# EAGLE board board_matei (EAGLE 9.7.0)
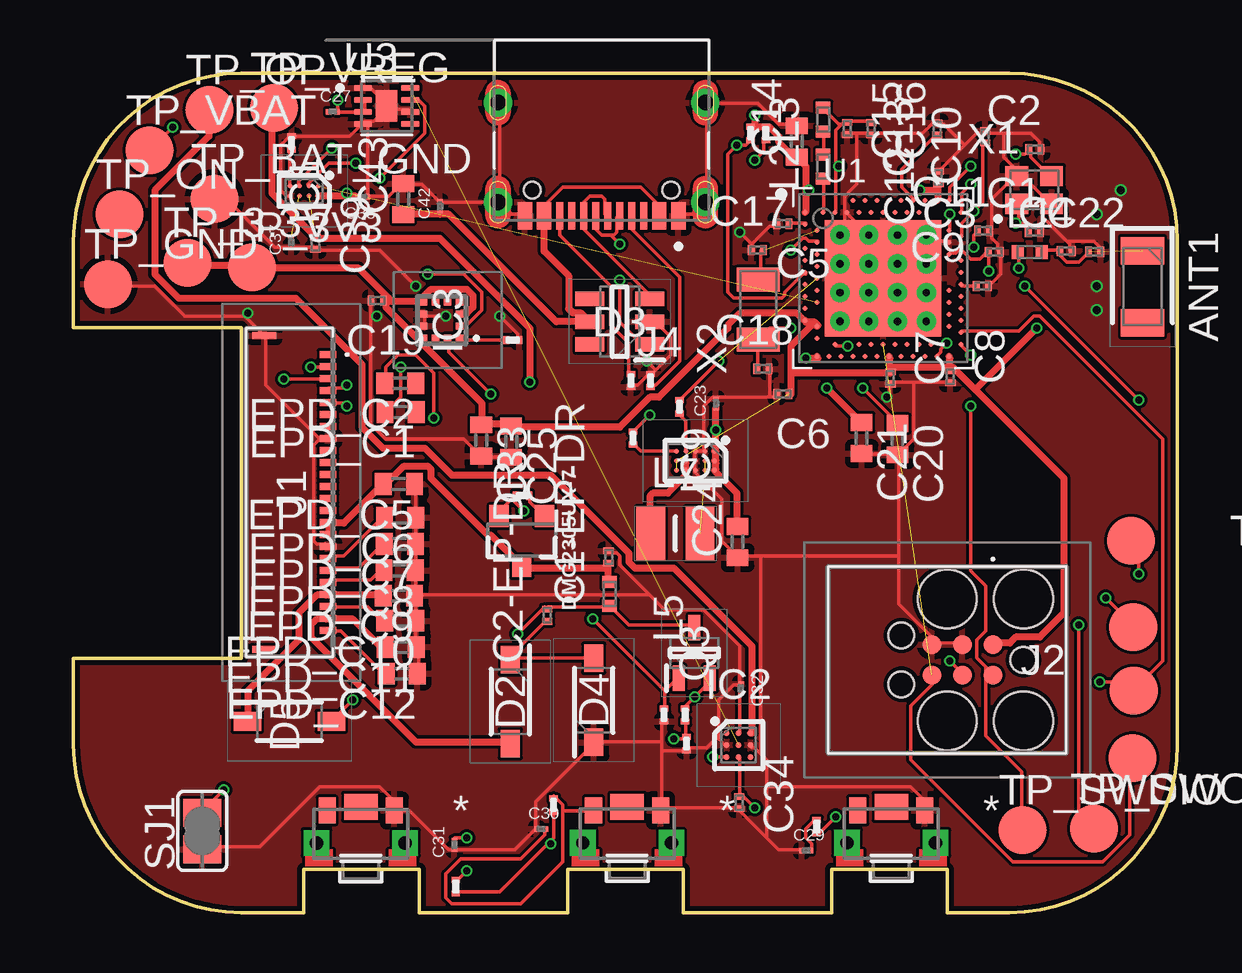
[diagram p0: board, top side]
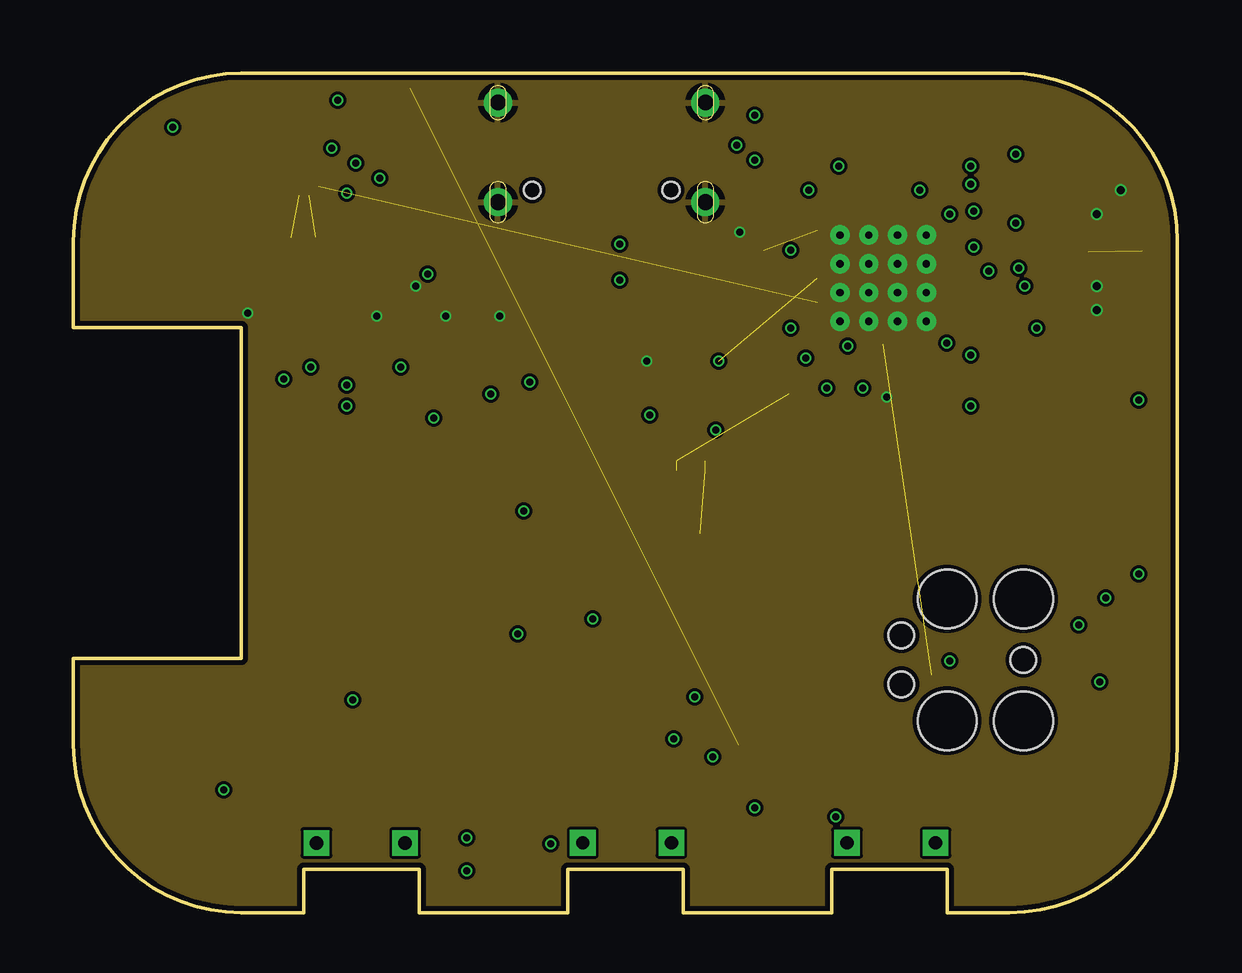
[diagram p1: board, inner layer Route2]
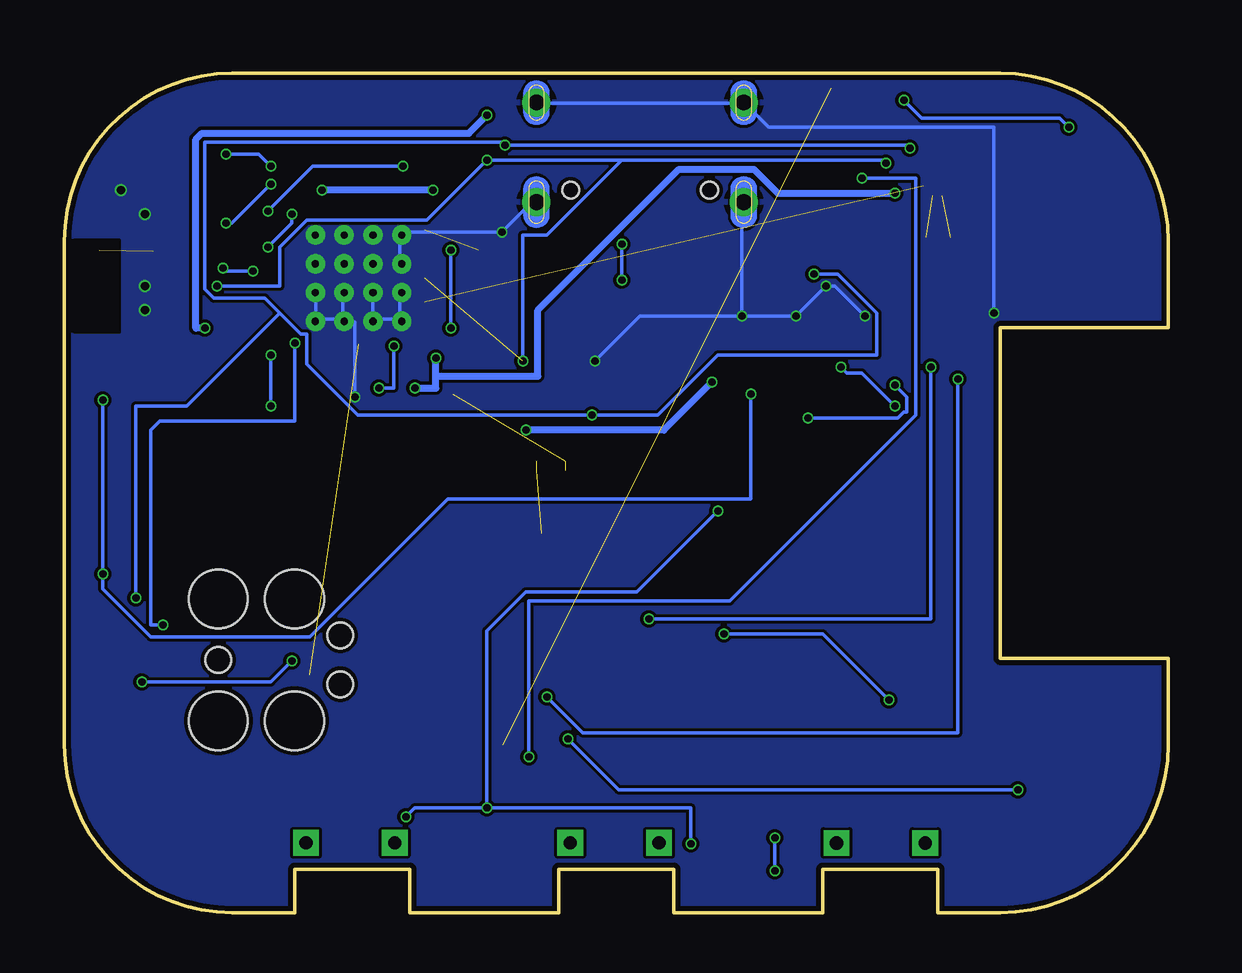
[diagram p2: board, bottom side, seen from below]

Size 46 x 35 mm. Coordinates in mm from the lower left corner, seen from the top.
Outline: 39,0 36.4,0 36.4,1.8 31.6,1.8 31.6,0 25.4,0 25.4,1.8 20.6,1.8 20.6,0 14.4,0 14.4,1.8 9.6,1.8 9.6,0 7,0 arc-90 0,7 0,10.6 7,10.6 7,24.4 0,24.4 0,28 arc-90 7,35 39,35 arc-90 46,28 46,7 arc-90 39,0
Copper layers (1*16): Top 0.035mm / dielectric 1.6mm / Bottom 0.035mm
Design rules "jlcpcb-2layers.dru": minimum track width 5mil, minimum drill 0.3mm, track to track 5mil, track to pad 5mil, pad to pad 5mil, via to via 5mil, smd to smd 5mil, copper to edge 0.2mm, drill to drill 6mil, minimum pad ring 10mil, minimum via ring 3mil, stop-mask expansion 4mil, vias tented up to drill 0mil, thermal gap 10mil
Net classes: 0 default: width 0.15 mm; 1 Power: width 0.3 mm
tRestrict: area 43.7,24.2 to 45.6,28
bRestrict: area 43.7,24.2 to 45.6,28
vRestrict: area 43.7,24.2 to 45.6,28; area 43.7,24.2 to 45.6,28

## Footprints (pad centres in the part's own frame; a part is rotated, then mirrored left to right if it is on the bottom)
2450AT18B100E_ANTC3216X140N = smd 1.15 x 1.8: 1 -1.5,0; 2 1.5,0
NORDIC_NRF_3_RESC0201_L = smd 0.28 x 0.43: 1 -0.255,0; 2 0.255,0
ESP32_C6_LIBRARY_1_ESP32_WROVER_EAGLE-LTSPICE_C0402 = smd 0.7 x 0.9: 1 -0.65,0; 2 0.65,0
GRM011R60J152KE01L_2_CAPC0201X13N = smd 0.22 x 0.23: 1 -0.185,0; 2 0.185,0
ESP32_C6_LIBRARY_5_SOD3716X135N = smd 1.15 x 0.8: 1 -1.75,0; 2 1.75,0
ESP32_C6_LIBRARY_3_SOT95P280X145-6N = smd 1.2 x 0.6: 1 -1.25,0.95; 2 -1.25,0; 3 -1.25,-0.95; 4 1.25,-0.95; 5 1.25,0; 6 1.25,0.95
ESP32_C6_LIBRARY_4_ESP32_C6_LIBRARY_4_ESP32_C6_LIBRARY_4_ESP32_C6_LIBRARY_4_ESP32_WROVER_SPARKFUN-DISCRETESEMI_SOT23-3 = smd 0.8 x 0.9: 1 -0.95,-1; 2 0.95,-1; 3 0,1.1
BQ25180YBGR_BGA8C40P2X4_100X155X50 = smd 0.2 x 0.2: A1 -0.2,0.6; A2 0.2,0.6; B1 -0.2,0.2; B2 0.2,0.2; C1 -0.2,-0.2; C2 0.2,-0.2; D1 -0.2,-0.6; D2 0.2,-0.6
DRV2605YZFR_BGA9C50P3X3_144X144X62 = smd 0.25 x 0.25: A1 -0.5,0.5; A2 0,0.5; A3 0.5,0.5; B1 -0.5,0; B2 0,0; B3 0.5,0; C1 -0.5,-0.5; C2 0,-0.5; C3 0.5,-0.5
BMA423_BMA423 = smd 0.3 x 0.35: 1 -0.75,-0.775; 2 -0.25,-0.775; 3 0.25,-0.775; 4 0.75,-0.775; 7 0.75,0.775; 8 0.25,0.775; 9 -0.25,0.775; 10 -0.75,0.775 | smd 0.35 x 0.3: 5 0.775,-0.25; 6 0.775,0.25; 11 -0.775,0.25; 12 -0.775,-0.25
RT6160AWSC_BGA15C40P3X5_140X230X60 = smd 0.216 x 0.216: A1 -0.4,0.8; A2 0,0.8; A3 0.4,0.8; B1 -0.4,0.4; B2 0,0.4; B3 0.4,0.4; C1 -0.4,0; C2 0,0; C3 0.4,0; D1 -0.4,-0.4; D2 0,-0.4; D3 0.4,-0.4; E1 -0.4,-0.8; E2 0,-0.8; E3 0.4,-0.8
503480-2400_5034802400 = smd 0.3 x 0.7: 1 -5.75,1.525; 2 -5.25,1.525; 3 -4.75,1.525; 4 -4.25,1.525; 5 -3.75,1.525; 6 -3.25,1.525; 7 -2.75,1.525; 8 -2.25,1.525; 9 -1.75,1.525; 10 -1.25,1.525; 11 -0.75,1.525; 12 -0.25,1.525; 13 0.25,1.525; 14 0.75,1.525; 15 1.25,1.525; 16 1.75,1.525; 17 2.25,1.525; 18 2.75,1.525; 19 3.25,1.525; 20 3.75,1.525; 21 4.25,1.525; 22 4.75,1.525; 23 5.25,1.525; 24 5.75,1.525 | smd 0.3 x 1: MP1 -6.54,-1.125; MP2 6.54,-1.125
TC2030-IDC_TC2030IDC = smd 0.783 x 0.783: 1 -0.953,-0.635; 2 -0.953,0.635; 3 0.317,-0.635; 4 0.317,0.635; 5 1.588,-0.635; 6 1.588,0.635 | hole 2.451: -2.223,-2.54; -2.223,2.54; 0.952,-2.54; 0.952,2.54 | hole 1.067: -2.223,0; 2.857,-1.016; 2.857,1.016
KH-TYPE-C-16P_KINGHELM_KH-TYPE-C-16P = smd 0.6 x 1.15: A1_B12 -3.2,4.725; A4_B9 -2.4,4.725; A9_B4 2.4,4.725; A12_B1 3.2,4.725 | smd 0.3 x 1.15: A5 -1.25,4.725; A6 -0.25,4.725; A7 0.25,4.725; A8 1.25,4.725; B5 1.75,4.725; B6 0.75,4.725; B7 -0.75,4.725; B8 -1.75,4.725 | drill 0.65 pad 1.05: SH1 -4.32,0; SH2 4.32,0; SH3 -4.32,4.15; SH4 4.32,4.15 | hole 0.7: -2.89,3.65; 2.89,3.65
NORDIC_NRF_2_RESC0402_L = smd 0.5 x 0.6: 1 -0.5,0; 2 0.5,0
MLP2016SR47MT0S1_INDC2016X100N = smd 1.2 x 2.2: 1 -1.028,0; 2 1.028,0
ESP32_C6_LIBRARY_6_SOT65P210X110-3N = smd 1.05 x 0.5: 1 -1.05,0.65; 2 -1.05,-0.65; 3 1.05,0
ERA-1AEB3401C_0201 = smd 0.35 x 0.25: 1 0,0.275; 2 0,-0.275
CPF0201D7K68C1_0201 = smd 0.35 x 0.25: 1 0,0.275; 2 0,-0.275
ESP32_C6_LIBRARY_7_JUMPER_SJ = smd 1.168 x 1.6: 1 -0.762,0; 2 0.762,0
2025-10-22_07-23-44_LIBRARY_SW_EVP-AKE31A_PAN = smd 0.711 x 1.092: 1 -1.4,-0.972; 2 1.4,-0.972 | drill 0.559 pad 0.914 square: 3 -1.848,0.381; 4 1.848,0.381 | smd 1.397 x 1.092: 5 0,-1.124
HECTOR_WATCH_1_TP20R = smd 2 x 2: TP 0,0
NORDIC_NRF_4_AQFN50P700X700X85_HS-74N = smd 4.85 x 4.85: P$74 0,0 | drill 0.3 pad 0.6: P$75 -1.8,1.8; P$76 -0.6,1.8; P$77 0.6,1.8; P$78 1.8,1.8; P$79 -1.8,0.6; P$80 -0.6,0.6; P$81 0.6,0.6; P$82 1.8,0.6; P$83 -1.8,-0.6; P$84 -0.6,-0.6; P$85 0.6,-0.6; P$86 1.8,-0.6; P$87 -1.8,-1.8; P$88 -0.6,-1.8; P$89 0.6,-1.8; P$90 1.8,-1.8 | smd 0.2 x 0.2: P$A8 -1.25,3.25; P$A10 -0.75,3.25; P$A12 -0.25,3.25; P$A14 0.25,3.25; P$A16 0.75,3.25; P$A18 1.25,3.25; P$A20 1.75,3.25; P$A22 2.25,3.25; P$A23 2.75,3.25; P$AA24 3.25,-2.25; P$AB2 -2.75,-2.5; P$AC5 -2,-2.75; P$AC9 -1,-2.75; P$AC11 -0.5,-2.75; P$AC13 0,-2.75; P$AC15 0.5,-2.75; P$AC17 1,-2.75; P$AC19 1.5,-2.75; P$AC21 2,-2.75; P$AC24 3.25,-2.75; P$AD2 -2.75,-3.25; P$AD4 -2.25,-3.25; P$AD6 -1.75,-3.25; P$AD8 -1.25,-3.25; P$AD10 -0.75,-3.25; P$AD12 -0.25,-3.25; P$AD14 0.25,-3.25; P$AD16 0.75,-3.25; P$AD18 1.25,-3.25; P$AD20 1.75,-3.25; P$AD22 2.25,-3.25; P$AD23 2.75,-3.25; P$B1 -3.25,2.75; P$B3 -2.5,2.75; P$B5 -2,2.75; P$B7 -1.5,2.75; P$B9 -1,2.75; P$B11 -0.5,2.75; P$B13 0,2.75; P$B15 0.5,2.75; P$B17 1,2.75; P$B19 1.5,2.75; P$B24 3.25,2.75; P$C1 -3.25,2.25; P$D2 -2.75,2; P$D23 2.75,2; P$E24 3.25,1.75; P$F2 -2.75,1.5; P$F23 2.75,1.5; P$G1 -3.25,1.25; P$H2 -2.75,1; P$H23 2.75,1; P$J1 -3.25,0.75; P$J24 3.25,0.75; P$K2 -2.75,0.5; P$L1 -3.25,0.25; P$L24 3.25,0.25; P$M2 -2.75,0; P$N1 -3.25,-0.25; P$N24 3.25,-0.25; P$P2 -2.75,-0.5; P$P23 2.75,-0.5; P$R1 -3.25,-0.75; P$R24 3.25,-0.75; P$T2 -2.75,-1; P$T23 2.75,-1; P$U1 -3.25,-1.25; P$U24 3.25,-1.25; P$V23 2.75,-1.5; P$W1 -3.25,-1.75; P$W24 3.25,-1.75; P$Y2 -2.75,-2; P$Y23 2.75,-2
ESP32_C6_LIBRARY_SON50P200X200X80-9N = smd 0.76 x 0.27: 1 -0.985,0.75; 2 -0.985,0.25; 3 -0.985,-0.25; 4 -0.985,-0.75; 5 0.985,-0.75; 6 0.985,-0.25; 7 0.985,0.25; 8 0.985,0.75 | smd 0.9 x 1.3: 9 0,0
NORDIC_NRF_BT-XTAL_2016_N = smd 0.95 x 0.85: 1 -0.725,-0.575; 2 0.725,-0.575; 3 0.725,0.575; 4 -0.725,0.575
NORDIC_NRF_1_XTAL_3215_N = smd 1 x 1.8: 1 -1.25,0; 2 1.25,0

## Placement (x,y rotation side)
ANT1  2450AT18B100E  [2450AT18B100E_ANTC3216X140N]  44.54,26.1 270 top
C1  12pF  [NORDIC_NRF_3_RESC0201_L]  40.04,28.38 0 top
C1-EP-DR  10uF  [NORDIC_NRF_3_RESC0201_L]  22.3,14.83 90 top
C2  12pF  [NORDIC_NRF_3_RESC0201_L]  40.06,31.82 0 top
C2-EP-DR  4.7uF/25V  [NORDIC_NRF_3_RESC0201_L]  19.74,12.4 90 top
C3  1pF  [NORDIC_NRF_3_RESC0201_L]  38.37,27.54 0 top
C4  1pF  [NORDIC_NRF_3_RESC0201_L]  41.36,27.58 0 top
C5  100nF  [NORDIC_NRF_3_RESC0201_L]  29.56,28.72 180 top
C6  4.7µF  [NORDIC_NRF_3_RESC0201_L]  29.56,21.62 180 top
C7  100nF  [NORDIC_NRF_3_RESC0201_L]  34.04,22.29 270 top
C8  100nF  [NORDIC_NRF_3_RESC0201_L]  36.54,22.34 270 top
C9  820pF  [NORDIC_NRF_3_RESC0201_L]  37.87,26.12 0 top
C10  N.C.  [NORDIC_NRF_3_RESC0201_L]  37.99,32.35 90 top
C11  100pF  [NORDIC_NRF_3_RESC0201_L]  37.92,28.42 0 top
C12  100nF  [NORDIC_NRF_3_RESC0201_L]  36.04,30.65 90 top
C13  N.C.  [NORDIC_NRF_3_RESC0201_L]  35.99,32.67 90 top
C14  4.7µF  [ESP32_C6_LIBRARY_1_ESP32_WROVER_EAGLE-LTSPICE_C0402]  30.14,32.15 90 top
C15  1.0µF  [NORDIC_NRF_3_RESC0201_L]  32.24,32.69 270 top
C16  47nF  [NORDIC_NRF_3_RESC0201_L]  33.24,32.68 270 top
C17  12pF  [NORDIC_NRF_3_RESC0201_L]  28.5,27.62 0 top
C18  12pF  [NORDIC_NRF_3_RESC0201_L]  28.73,22.67 0 top
C19  100nF  [NORDIC_NRF_3_RESC0201_L]  12.66,25.52 180 top
C20  4.7µF  [ESP32_C6_LIBRARY_1_ESP32_WROVER_EAGLE-LTSPICE_C0402]  34.34,19.74 270 top
C21  4.7µF  [ESP32_C6_LIBRARY_1_ESP32_WROVER_EAGLE-LTSPICE_C0402]  32.84,19.79 270 top
C22  N.C.  [NORDIC_NRF_3_RESC0201_L]  42.55,27.55 0 top
C23  0.1uF  [GRM011R60J152KE01L_2_CAPC0201X13N]  26.77,21.23 90 top
C24  10uF  [ESP32_C6_LIBRARY_1_ESP32_WROVER_EAGLE-LTSPICE_C0402]  27.67,15.45 90 top
C25  22uF  [ESP32_C6_LIBRARY_1_ESP32_WROVER_EAGLE-LTSPICE_C0402]  18.24,19.64 270 top
C27  0.1uF  [GRM011R60J152KE01L_2_CAPC0201X13N]  10.81,33.39 0 top
C29  1uF  [GRM011R60J152KE01L_2_CAPC0201X13N]  30.53,2.59 0 top
C30  1uF  [GRM011R60J152KE01L_2_CAPC0201X13N]  19.49,3.49 0 top
C31  1uF  [GRM011R60J152KE01L_2_CAPC0201X13N]  15.87,2.83 90 top
C32  1uF  [GRM011R60J152KE01L_2_CAPC0201X13N]  27.81,9.35 270 top
C33  22uF  [ESP32_C6_LIBRARY_1_ESP32_WROVER_EAGLE-LTSPICE_C0402]  16.99,19.69 270 top
C34  0.1uF  [NORDIC_NRF_3_RESC0201_L]  27.74,4.59 270 top
C37  1uF  [GRM011R60J152KE01L_2_CAPC0201X13N]  9.07,27.95 90 top
C38  1uF  [GRM011R60J152KE01L_2_CAPC0201X13N]  12.05,29.85 180 top
C39  10uF  [NORDIC_NRF_3_RESC0201_L]  10.09,27.91 270 top
C42  0.1uF  [GRM011R60J152KE01L_2_CAPC0201X13N]  15.27,29.45 90 top
C43  4.7uF  [ESP32_C6_LIBRARY_1_ESP32_WROVER_EAGLE-LTSPICE_C0402]  13.74,29.75 90 top
D2  ESP32_C6_LIBRARY_5_MBR0530  [ESP32_C6_LIBRARY_5_SOD3716X135N]  18.2,8.8 270 top
D3  USBLC6-2SC6Y  [ESP32_C6_LIBRARY_3_SOT95P280X145-6N]  22.76,24.64 180 top
D4  ESP32_C6_LIBRARY_5_MBR0530  [ESP32_C6_LIBRARY_5_SOD3716X135N]  21.68,8.86 90 top
D5  ESP32_C6_LIBRARY_5_MBR0530  [ESP32_C6_LIBRARY_5_SOD3716X135N]  9,7.98 0 top
DMG2305UX-7  20V/4.2A/52mΩ/1.4W  [ESP32_C6_LIBRARY_4_ESP32_C6_LIBRARY_4_ESP32_C6_LIBRARY_4_ESP32_C6_LIBRARY_4_ESP32_WROVER_SPARKFUN-DISCRETESEMI_SOT23-3]  18.68,15.54 180 top
EPD_C1  1uF/50V  [ESP32_C6_LIBRARY_1_ESP32_WROVER_EAGLE-LTSPICE_C0402]  13.63,20.87 180 top
EPD_C2  1uF/50V  [ESP32_C6_LIBRARY_1_ESP32_WROVER_EAGLE-LTSPICE_C0402]  13.62,22.07 180 top
EPD_C5  0.1uF/50V  [ESP32_C6_LIBRARY_1_ESP32_WROVER_EAGLE-LTSPICE_C0402]  13.56,17.87 180 top
EPD_C6  1uF/50V  [ESP32_C6_LIBRARY_1_ESP32_WROVER_EAGLE-LTSPICE_C0402]  13.61,16.47 180 top
EPD_C7  1uF/50V  [ESP32_C6_LIBRARY_1_ESP32_WROVER_EAGLE-LTSPICE_C0402]  13.6,15.37 180 top
EPD_C8  1uF/50V  [ESP32_C6_LIBRARY_1_ESP32_WROVER_EAGLE-LTSPICE_C0402]  13.59,14.27 180 top
EPD_C9  1uF/50V  [ESP32_C6_LIBRARY_1_ESP32_WROVER_EAGLE-LTSPICE_C0402]  13.56,13.22 180 top
EPD_C10  1uF/50V  [ESP32_C6_LIBRARY_1_ESP32_WROVER_EAGLE-LTSPICE_C0402]  13.62,12.17 180 top
EPD_C11  1uF/50V  [ESP32_C6_LIBRARY_1_ESP32_WROVER_EAGLE-LTSPICE_C0402]  13.64,11.07 180 top
EPD_C12  1uF/50V  [ESP32_C6_LIBRARY_1_ESP32_WROVER_EAGLE-LTSPICE_C0402]  13.68,9.97 180 top
IC1  BQ25180YBGR  [BQ25180YBGR_BGA8C40P2X4_100X155X50]  9.62,30.09 270 top
IC2  DRV2605YZFR  [DRV2605YZFR_BGA9C50P3X3_144X144X62]  27.72,6.99 0 top
IC3  BMA421  [BMA423_BMA423]  15.34,24.7 90 top
IC9  RT6160AWSC  [RT6160AWSC_BGA15C40P3X5_140X230X60]  25.92,18.84 270 top
J1  503480-2400  [503480-2400_5034802400]  9.08,17.52 270 top
J2  TC2030-IDC  [TC2030-IDC_TC2030IDC]  37.36,10.54 180 top
J4  KH-TYPE-C-16P  [KH-TYPE-C-16P_KINGHELM_KH-TYPE-C-16P]  22.01,33.77 180 top
L1  3.9nH  [NORDIC_NRF_2_RESC0402_L]  39.85,27.54 0 top
L2  10µH  [NORDIC_NRF_2_RESC0402_L]  31.24,31.1 90 top
L3  15nH  [NORDIC_NRF_2_RESC0402_L]  31.24,33.05 90 top
L5  68uH  [NORDIC_NRF_2_RESC0402_L]  22.34,13.29 270 top
L7  FTC252012SR47MBCA  [MLP2016SR47MT0S1_INDC2016X100N]  25.08,15.81 180 top
Q3  SI1308EDL-T1-GE3  [ESP32_C6_LIBRARY_6_SOT65P210X110-3N]  25.87,10.83 90 top
R1_EP_DR  0.47  [ERA-1AEB3401C_0201]  25.49,8.25 180 top
R1_USB  5K1  [CPF0201D7K68C1_0201]  24.05,22.19 0 top
R2  0  [CPF0201D7K68C1_0201]  23.31,19.79 0 top
R2_EP_DR  10K  [ERA-1AEB3401C_0201]  24.61,8.25 180 top
R2_USB  5K1  [ERA-1AEB3401C_0201]  23.23,22.19 0 top
R3  0  [ERA-1AEB3401C_0201]  18.31,23.87 270 top
R4  0  [CPF0201D7K68C1_0201]  25.25,21.09 0 top
R5  10k  [CPF0201D7K68C1_0201]  20.01,4.49 0 top
R7  10k  [CPF0201D7K68C1_0201]  30.97,3.59 0 top
R8  10k  [CPF0201D7K68C1_0201]  15.93,1.09 0 top
R9  10K  [ERA-1AEB3401C_0201]  9.09,32.09 0 top
R17  3K3  [CPF0201D7K68C1_0201]  28.85,32.49 0 top
R18  3K3  [CPF0201D7K68C1_0201]  28.21,32.49 0 top
R_PWR_EPD  10K  [CPF0201D7K68C1_0201]  18.71,17.39 270 top
R_TYPE_SEL  2.2  [ERA-1AEB3401C_0201]  25.55,7.05 180 top
SJ1  [ESP32_C6_LIBRARY_7_JUMPER_SJ]  5.37,3.41 90 top
SW_DN  2025-10-22_07-23-44_LIBRARY_EVP-AKE31ASW_EVP-AKE31A_PAN  [2025-10-22_07-23-44_LIBRARY_SW_EVP-AKE31A_PAN]  34.08,3.29 180 top
SW_ENT  2025-10-22_07-23-44_LIBRARY_EVP-AKE31ASW_EVP-AKE31A_PAN  [2025-10-22_07-23-44_LIBRARY_SW_EVP-AKE31A_PAN]  11.98,3.29 180 top
SW_UP  2025-10-22_07-23-44_LIBRARY_EVP-AKE31ASW_EVP-AKE31A_PAN  [2025-10-22_07-23-44_LIBRARY_SW_EVP-AKE31A_PAN]  23.07,3.29 180 top
TP_3.3V  HECTOR_WATCH_1_TPTP20R  [HECTOR_WATCH_1_TP20R]  4.75,27.1 0 top
TP_3V3  HECTOR_WATCH_1_TPTP20R  [HECTOR_WATCH_1_TP20R]  7.45,26.9 0 top
TP_BAT_GND  HECTOR_WATCH_1_TPTP20R  [HECTOR_WATCH_1_TP20R]  5.88,29.75 0 top
TP_GND  HECTOR_WATCH_1_TPTP20R  [HECTOR_WATCH_1_TP20R]  1.44,26.2 0 top
TP_ON  HECTOR_WATCH_1_TPTP20R  [HECTOR_WATCH_1_TP20R]  1.93,29.11 0 top
TP_OP  HECTOR_WATCH_1_TPTP20R  [HECTOR_WATCH_1_TP20R]  5.66,33.46 0 top
TP_RESET  HECTOR_WATCH_1_TPTP20R  [HECTOR_WATCH_1_TP20R]  44.12,6.45 0 top
TP_SCL  HECTOR_WATCH_1_TPTP20R  [HECTOR_WATCH_1_TP20R]  44.07,15.5 0 top
TP_SDA  HECTOR_WATCH_1_TPTP20R  [HECTOR_WATCH_1_TP20R]  44.16,11.9 0 top
TP_SWDCLK  HECTOR_WATCH_1_TPTP20R  [HECTOR_WATCH_1_TP20R]  44.18,9.25 0 top
TP_SWDIO  HECTOR_WATCH_1_TPTP20R  [HECTOR_WATCH_1_TP20R]  39.55,3.44 0 top
TP_SWO  HECTOR_WATCH_1_TPTP20R  [HECTOR_WATCH_1_TP20R]  42.53,3.5 0 top
TP_VBAT  HECTOR_WATCH_1_TPTP20R  [HECTOR_WATCH_1_TP20R]  3.17,31.78 0 top
TP_VREG  HECTOR_WATCH_1_TPTP20R  [HECTOR_WATCH_1_TP20R]  8.36,33.55 0 top
U1  NRF52840_QF  [NORDIC_NRF_4_AQFN50P700X700X85_HS-74N]  33.74,26.45 0 top
U3  MAX17048G+T10  [ESP32_C6_LIBRARY_SON50P200X200X80-9N]  13.05,33.63 0 top
X1  32MHz  [NORDIC_NRF_BT-XTAL_2016_N]  40.03,30.13 0 top
X2  32.768kHz  [NORDIC_NRF_1_XTAL_3215_N]  28.53,25.14 90 top

## Library data of the parts
ANT1 = InkTime_v5 (1); ARROW_PART_NUMBER: 2450AT18B100E; ARROW_PRICE-STOCK: https://www.arrow.com/en/products/2450at18b100e/johanson-dielectrics?utm_currency=USD&region=nac; DESCRIPTION: Antennas 2.45GHz ANTENNA; HEIGHT: 1.4mm; MANUFACTURER_NAME: JOHANSON TECHNOLOGY; MANUFACTURER_PART_NUMBER: 2450AT18B100E; MOUSER_PART_NUMBER: 609-2450AT18B100E; MOUSER_PRICE-STOCK: https://www.mouser.co.uk/ProductDetail/Johanson-Technology/2450AT18B100E?qs=yCnrNFeXz%252Bh5MFsFIXGZGA%3D%3D
C1 C1-EP-DR C2 C2-EP-DR C3-C13 C15-C19 C22 C34 C39 L1-L3 L5 R1_EP_DR R1_USB R2 R2_EP_DR R2_USB R3-R5 R7-R9 R17 R18 R_PWR_EPD R_TYPE_SEL SJ1 TP_3.3V TP_3V3 TP_BAT_GND TP_GND TP_ON TP_OP TP_RESET TP_SCL TP_SDA TP_SWDCLK TP_SWDIO TP_SWO TP_VBAT TP_VREG U1 X1 X2 = InkTime_v5 (1)
C14 C20 C21 C24 C25 C33 C43 EPD_C1 EPD_C2 EPD_C5-EPD_C12 = InkTime_v5 (1); SPICEMODEL: NONE; SPICEPREFIX: C
C23 C27 C29-C32 C37 C38 C42 = InkTime_v5 (1); AVAILABILITY: In Stock; CHECK_PRICES: https://www.snapeda.com/parts/GRM011R60J152KE01L/Murata/view-part/?ref=eda; DESCRIPTION: SMD Capacitor X5R(EIA) with Capacitance: 1500pF Tol. 10%. Rated Voltage: 6.3Vdc; MF: Murata; MP: GRM011R60J152KE01L; PACKAGE: 0201 Murata; PRICE: None; SNAPEDA_LINK: https://www.snapeda.com/parts/GRM011R60J152KE01L/Murata/view-part/?ref=snap
D2 D4 D5 = InkTime_v5 (1); AVAILABILITY: In Stock; CHECK_PRICES: https://www.snapeda.com/parts/MBR0530/Onsemi/view-part/?ref=eda; DESCRIPTION: Diode Schottky 30 V 500mA Surface Mount SOD-123; MF: ON Semiconductor; MP: MBR0530; PACKAGE: SOD-123-2 ON Semiconductor; PRICE: None; PURCHASE-URL: https://www.snapeda.com/api/url_track_click_mouser/?unipart_id=179458&manufacturer=ON Semiconductor&part_name=MBR0530&search_term=None; SNAPEDA_LINK: https://www.snapeda.com/parts/MBR0530/Onsemi/view-part/?ref=snap
D3 = InkTime_v5 (1); AVAILABILITY: In Stock; CHECK_PRICES: https://www.snapeda.com/parts/USBLC6-2SC6Y/STMicroelectronics/view-part/?ref=eda; DESCRIPTION: 17V Clamp 5A (8/20µs) Ipp Tvs Diode Surface Mount SOT-23-6; MF: STMicroelectronics; MP: USBLC6-2SC6Y; PACKAGE: SOT-23-6 STMicroelectronics; PRICE: None; SNAPEDA_LINK: https://www.snapeda.com/parts/USBLC6-2SC6Y/STMicroelectronics/view-part/?ref=snap
DMG2305UX-7 = InkTime_v5 (1); PROD_ID: TRAN-14388
IC1 = InkTime_v5 (1); ARROW_PART_NUMBER: BQ25180YBGR; ARROW_PRICE-STOCK: https://www.arrow.com/en/products/bq25180ybgr/texas-instruments?utm_currency=USD&region=nac; DESCRIPTION: Charger IC Lithium Ion/Polymer, Lithium Iron Phosphate 8-DSBGA (1.6x1.1); HEIGHT: 0.5mm; MANUFACTURER_NAME: Texas Instruments; MANUFACTURER_PART_NUMBER: BQ25180YBGR; MOUSER_PART_NUMBER: 595-BQ25180YBGR; MOUSER_PRICE-STOCK: https://www.mouser.co.uk/ProductDetail/Texas-Instruments/BQ25180YBGR?qs=doiCPypUmgEWjAK%252BJAX6Tw%3D%3D
IC2 = InkTime_v5 (1); ARROW_PART_NUMBER: DRV2605YZFR; ARROW_PRICE-STOCK: https://www.arrow.com/en/products/drv2605yzfr/texas-instruments?region=nac; DESCRIPTION: Haptic Driver for ERM/LRA with Built-In Library and Smart Loop Architecture; HEIGHT: 0.625mm; MANUFACTURER_NAME: Texas Instruments; MANUFACTURER_PART_NUMBER: DRV2605YZFR
IC3 = InkTime_v5 (1); ARROW_PART_NUMBER: BMA423; ARROW_PRICE-STOCK: https://www.arrow.com/en/products/bma423/bosch; DESCRIPTION: Accelerometers Triaxial low-g 12bit Acceleration Sensor; HEIGHT: 1mm; MANUFACTURER_NAME: BOSCH; MANUFACTURER_PART_NUMBER: BMA423; MOUSER_PART_NUMBER: 262-BMA423; MOUSER_PRICE-STOCK: https://www.mouser.co.uk/ProductDetail/Bosch-Sensortec/BMA423?qs=HXFqYaX1Q2xC%252BSgeGoX3mg%3D%3D
IC9 = InkTime_v5 (1); DESCRIPTION: Buck-Boost Regulator Positive Output Step-Up/Step-Down I2C DC-DC Controller IC 15-WL-CSP (BSC) (1.4x2.3); HEIGHT: 0.6mm; MANUFACTURER_NAME: RICHTEK; MANUFACTURER_PART_NUMBER: RT6160AWSC; MOUSER_PART_NUMBER: 835-RT6160AWSC; MOUSER_PRICE-STOCK: https://www.mouser.co.uk/ProductDetail/Richtek/RT6160AWSC?qs=amGC7iS6iy%2FLd9PSoixZXQ%3D%3D
J1 = InkTime_v5 (1); DESCRIPTION: FFC & FPC Connectors 0.5mm FPC RA SMT Dual Contact 24Ckt; HEIGHT: 1.87mm; MANUFACTURER_NAME: Molex; MANUFACTURER_PART_NUMBER: 503480-2400; MOUSER_PART_NUMBER: 538-503480-2400; MOUSER_PRICE-STOCK: https://www.mouser.co.uk/ProductDetail/Molex/503480-2400?qs=OAhjpuo3Vu7efIoxFh9AOw%3D%3D
J2 = InkTime_v5 (1); DESCRIPTION: CABLE ADAPTER 6 POS; HEIGHT: 19mm; MANUFACTURER_NAME: Tag Connect; MANUFACTURER_PART_NUMBER: TC2030-IDC
J4 = InkTime_v5 (1); AVAILABILITY: Not in stock; CHECK_PRICES: https://www.snapeda.com/parts/KH-TYPE-C-16P/Kinghelm/view-part/?ref=eda; MF: kinghelm; MP: KH-TYPE-C-16P; PACKAGE: None; PRICE: None; SNAPEDA_LINK: https://www.snapeda.com/parts/KH-TYPE-C-16P/Kinghelm/view-part/?ref=snap
L7 = InkTime_v5 (1); DESCRIPTION: SMD / SMT Inductors (Coils), L=0.47?H, L x W x T :; HEIGHT: 1mm; JLCPCB: https://jlcpcb.com/partdetail/6763488-FTC252012SR47MBCA/C5832368; MANUFACTURER_NAME: TDK; MANUFACTURER_PART_NUMBER: FTC252012SR47MBCA
Q3 = InkTime_v5 (1); AVAILABILITY: In Stock; CHECK_PRICES: https://www.snapeda.com/parts/SI1308EDL-T1-GE3/Vishay+Siliconix/view-part/?ref=eda; DESCRIPTION: Si1308EDL-T1-GE3 N-channel MOSFET Transistor, 1.5 A, 30 V, 3-Pin SC-70 | Siliconix / Vishay SI1308EDL-T1-GE3; MF: Vishay Siliconix; MP: SI1308EDL-T1-GE3; PACKAGE: SOT-323 Vishay Semiconductor; PRICE: None; PURCHASE-URL: https://www.snapeda.com/api/url_track_click_mouser/?unipart_id=274603&manufacturer=Vishay Siliconix&part_name=SI1308EDL-T1-GE3&search_term=None; SNAPEDA_LINK: https://www.snapeda.com/parts/SI1308EDL-T1-GE3/Vishay+Siliconix/view-part/?ref=snap
SW_DN SW_ENT SW_UP = InkTime_v5 (1); COPYRIGHT: Copyright (C) 2025 Ultra Librarian. All rights reserved.; DIGI-KEY_PART_NUMBER_1: P123437TR-ND; DIGI-KEY_PART_NUMBER_2: P123437CT-ND; DIGI-KEY_PART_NUMBER_3: P123437DKR-ND; MANUFACTURER_NAME: Panasonic; MANUFACTURER_PART_NUMBER: EVP-AKE31A
U3 = InkTime_v5 (1); AVAILABILITY: In Stock; CHECK_PRICES: https://www.snapeda.com/parts/MAX17048G+T10/Analog+Devices/view-part/?ref=eda; DESCRIPTION: 3µA 1-Cell/2-Cell Fuel Gauge with ModelGauge; MF: Analog Devices; MP: MAX17048G+T10; PACKAGE: TDFN-8 Maxim; PRICE: None; PURCHASE-URL: https://www.snapeda.com/api/url_track_click_mouser/?unipart_id=329239&manufacturer=Analog Devices&part_name=MAX17048G+T10&search_term=None; SNAPEDA_LINK: https://www.snapeda.com/parts/MAX17048G+T10/Analog+Devices/view-part/?ref=snap

## Nets
3V3/1.7D: C34.1 DMG2305UX-7.2 IC2.C2 R5.2 R7.2 R8.2 R_PWR_EPD.2
3V3/2.4A [Power]: C6.1 C7.1 C8.1 C12.1 C14.1 C19.1 C25.1 C33.1 IC3.3 IC3.7 IC3.10 IC9.E2 IC9.E3 J2.1 R17.1 R18.1 TP_3.3V.TP TP_3V3.TP U1.P$A22 U1.P$AD14 U1.P$AD23 U1.P$B1 U1.P$W1 U1.P$Y2
ALERT/1.6C: U3.5
ALERT/2.5C: U1.P$J24
D+/1.5D: D3.4
D+/2.7D: U1.P$AD6
D-/1.5D: D3.6
D-/2.7D: U1.P$AD4
DN: D3.1 J4.A7 J4.B7
DP: D3.3 J4.A6 J4.B6
EPD_3V3 [Power]: C1-EP-DR.1 DMG2305UX-7.3 EPD_C5.2 J1.15 J1.16 L5.1
EPD_BUSY/1.5D: J1.9
EPD_BUSY/2.2D: U1.P$AD12
EPD_CS/1.4C: J1.12
EPD_CS/2.2D: U1.P$K2
EPD_DC/1.5D: J1.11
EPD_DC/2.2D: U1.P$AD10
EPD_RST/1.5D: J1.10
EPD_RST/2.2D: U1.P$AC11
GDR: J1.2 Q3.1 R2_EP_DR.2
GND: C1-EP-DR.2 C1.2 C2.2 C3.2 C4.2 C5.2 C6.2 C7.2 C8.2 C9.2 C10.2 C11.2 C12.2 C13.2 C14.2 C15.2 C16.2 C17.1 C18.2 C19.2 C20.2 C21.2 C22.2 C23.2 C24.1 C25.2 C29.1 C30.1 C31.1 C32.1 C33.2 C34.2 C37.1 C38.1 C39.2 C42.2 C43.2 D3.2 D4.1 EPD_C5.1 EPD_C6.1 EPD_C7.1 EPD_C8.1 EPD_C9.1 EPD_C10.1 EPD_C11.1 EPD_C12.1 IC1.D2 IC2.B1 IC2.B3 IC3.8 IC3.9 IC9.B1 IC9.C1 IC9.C2 IC9.C3 J1.8 J1.17 J1.MP1 J2.3 J2.5 J4.A1_B12 J4.A12_B1 J4.SH1 J4.SH2 J4.SH3 J4.SH4 R1_USB.1 R2_EP_DR.1 R2_USB.2 R3.1 R9.1 R_TYPE_SEL.1 SJ1.1 SW_DN.1 SW_ENT.1 SW_UP.1 TP_BAT_GND.TP TP_GND.TP U1.P$74 U1.P$75 U1.P$76 U1.P$77 U1.P$78 U1.P$79 U1.P$80 U1.P$81 U1.P$82 U1.P$83 U1.P$84 U1.P$85 U1.P$86 U1.P$87 U1.P$88 U1.P$89 U1.P$90 U1.P$B7 U1.P$F23 U3.1 U3.4 U3.6 U3.9 X1.2 X1.4
HAPTIC_EN/1.4C: IC2.A1
HAPTIC_EN/2.6A: U1.P$U1
IMU_INT1: U1.P$N1
IMU_INT2: U1.P$P2
JJ: C10.1 C15.1 C16.1 L3.2 U1.P$B5 U1.P$E24
LX1 [Power]: IC9.B2 IC9.B3 L7.1
LX2 [Power]: IC9.D2 IC9.D3 L7.2
MOSI/1.5B: J1.14
MOSI/2.2D: U1.P$B13
MU_INT1: IC3.5
MU_INT2: IC3.6
N$1: IC1.D1 R9.2
N$2: IC9.D1 R4.2
N$3: IC9.E1 R2.2
N$4: IC3.1 R3.2
N$5: C20.1 U1.P$AC5
N$6: C18.1 U1.P$F2 X2.1
N$7: C17.2 U1.P$D2 X2.2
N$8: C5.1 U1.P$C1
N$9: C9.1 U1.P$N24
N$10: L2.1 U1.P$B3
N$11: L2.2 L3.1
N$12: C3.1 L1.1 U1.P$H23
N$13: ANT1.1 C4.1 C22.1 L1.2
N$14: C11.1 U1.P$D23
N$15: C2.1 U1.P$A23 X1.3
N$16: C1.1 U1.P$B24 X1.1
N$17: C2-EP-DR.2 D5.2 L5.2 Q3.3
N$18: C2-EP-DR.1 D2.1 D4.2
N$20: R1_EP_DR.1 R_TYPE_SEL.2 SJ1.2
N$21: J1.MP2
N$22: C13.1 U1.P$A18
N$23: C32.2 IC2.A2
N$24: EPD_C2.2 J1.4
N$25: EPD_C1.2 J1.5
N$26: EPD_C2.1
N$27: EPD_C1.1
N$28: EPD_C6.2 J1.18
N$29: EPD_C7.2 J1.19
N$30: EPD_C8.2 J1.20
N$31: J4.A5 R1_USB.2
N$32: EPD_C10.2 J1.22
N$33: C31.2 R8.1
N$34: EPD_C12.2 J1.24
N$35: J4.B5 R2_USB.1
N$36: C29.2 R7.1
OUT: IC2.C3
OUT+ [Power]: IC2.A3 TP_OP.TP
OUT- [Power]: TP_ON.TP
P0.04: U1.P$J1
P0.09: U1.P$L24
P0.13/1.5D: C30.2 R5.1 SW_UP.2
P0.13/2.6C: U1.P$AD8
P0.14/1.5D: SW_ENT.2
P0.14/2.7C: U1.P$AC9
P0.19: U1.P$AC15
P0.20: U1.P$AD16
P0.21: U1.P$AC17
P0.22: U1.P$AD18
P0.23: U1.P$AC19
P0.24: U1.P$AD20
P0.25: U1.P$AC21
P0.26: U1.P$G1
P0.27: U1.P$H2
P0.28: U1.P$B11
P0.29: U1.P$A10
P0.30: U1.P$B9
P0.31: U1.P$A8
P1.01/1.6C: DMG2305UX-7.1 R_PWR_EPD.1
P1.01/2.4B: U1.P$Y23
P1.02/1.6C: SW_DN.2
P1.02/2.8C: U1.P$W24
P1.03: U1.P$V23
P1.04: U1.P$U24
P1.05: U1.P$T23
P1.06: U1.P$R24
P1.07: U1.P$P23
P1.09: U1.P$R1
P1.10: U1.P$A20
P1.11: U1.P$B19
P1.12: U1.P$B17
P1.13: U1.P$A16
P1.14: U1.P$B15
P1.15: U1.P$A14
PMIC_INT: IC1.A1 U1.P$T2
PREVGH [Power]: D5.1 EPD_C9.2 J1.21
PREVGL [Power]: D2.2 EPD_C11.2 J1.23
RESE: J1.3 Q3.2 R1_EP_DR.2
RESET: J2.6 TP_RESET.TP U1.P$AC13
SCK/1.5B: J1.13
SCK/2.2D: U1.P$A12
SCL/1.4C: IC2.C1 U3.7
SCL/2.4C: IC1.B1 IC3.12 R4.1 R17.2 TP_SCL.TP U1.P$M2
SDA/1.4C: IC2.B2 U3.8
SDA/2.4C: IC1.C1 IC3.2 R2.1 R18.2 TP_SDA.TP U1.P$L1
SWDCLK: J2.4 TP_SWDCLK.TP U1.P$AA24
SWDIO: J2.2 TP_SWDIO.TP U1.P$AC24
SWO: TP_SWO.TP U1.P$AD22
VBAT/1.2A: C27.2 TP_VBAT.TP U3.2 U3.3
VBAT/2.5C [Power]: C37.2 IC1.C2
VBUS/1.5D: C42.1 C43.1 D3.5 J4.A4_B9 J4.A9_B4
VBUS/2.6D [Power]: C21.1 C38.2 IC1.A2 U1.P$AD2
VREG [Power]: C23.1 C24.2 C39.1 IC1.B2 IC9.A1 IC9.A2 IC9.A3 TP_VREG.TP

## Tracks (layer width: path | path; a pad name or v marks a point on that pad's centre or on a via)
3V3/1.7D  (via drill 0.3)
  Top 0.15: 19.77,2.87 20.02,3.12 20.02,4.12 R5.2 | 19.77,2.87 17.77,0.87 16.02,0.87 R8.2 | 18.27,17.25 17.64,16.62 DMG2305UX-7.2 | 18.27,17.25 18.39,17.37 R_PWR_EPD.2 | 27.77,5 27.77,4.87 C34.1 | 27.77,5 27.77,6.37 IC2.C2 | v31.77,4 31.14,3.37 31.02,3.37 R7.2 | 27.77,5 v28.39,4.37 | v18.77,16.75 18.27,17.25 | v19.89,2.87 19.77,2.87
  Bottom 0.15: v31.77,4 31.39,4.37 v28.39,4.37 | v18.77,16.75 22.14,13.37 26.77,13.37 28.39,11.75 v28.39,4.37 | v19.89,2.87 19.89,4.37 v28.39,4.37
3V3/2.4A  (via drill 0.3)  (2 unrouted)
  Top 0.3: TP_3.3V.TP 4.77,27 7.39,27 TP_3V3.TP 7.52,26.87 11.89,26.87 13.14,25.62 13.14,25.5 | 14.39,24 14.27,24 13.02,25.25 13.02,25.5 | 14.39,24 14.52,24 IC3.10 | 13.02,25.5 C19.1 | 13.14,25.5 14.52,25.5 | 14.52,25.5 IC3.7 | 13.14,25.5 13.02,25.5 | IC3.3 16.14,25 16.39,25 16.64,25.25 16.64,25.75 16.39,26 14.89,26 14.52,25.62 14.52,25.5 | 14.39,24 14.39,23.87 17.02,21.25 17.02,20.5 C33.1 17.02,20.37 18.14,20.37 C25.1 18.39,20.25 22.77,20.25 24.02,21.5 24.39,21.5 27.27,24.37 27.27,24.5 27.77,25 30.14,25 30.39,24.75 U1.P$W1 30.52,24.62 30.77,24.62 | 36.02,30.12 36.02,30.37 C12.1 | 36.02,30.12 36.02,29.75 U1.P$A22 | 28.39,32.75 28.77,32.75 R17.1 28.89,32.75 29.02,32.75 29.39,32.37 29.39,32.12 30.02,31.5 C14.1 30.52,31.12 30.52,30.12 | 28.39,32.75 28.27,32.75 R18.1 | 30.52,30.12 30.52,29.25 U1.P$B1 | v35.27,30.12 36.02,30.12 | v30.64,30.12 30.52,30.12 | 30.77,24.62 30.89,24.62 31.02,24.5 U1.P$Y2 | 29.89,22.5 29.89,23.62 30.77,24.5 30.77,24.62 | 29.89,22.5 29.89,21.62 C6.1 | 36.52,22.75 36.52,22.62 C8.1 | 36.52,22.75 36.52,23.12 U1.P$AD23 | 34.02,22.75 34.02,22.62 C7.1 34.02,22.5 29.89,22.5 | 34.02,22.75 34.02,23.12 U1.P$AD14 | 34.02,22.75 36.52,22.75 | 37.58,21.81 36.64,22.75 36.52,22.75 | 37.58,21.81 41.27,18.12 41.27,12.5 40.27,11.5 39.27,11.5 39.02,11.25 38.39,11.25 J2.1 | v28.39,33.25 28.39,32.75 | 37.58,21.81 v40.14,24.37
  Bottom 0.3: v30.64,30.12 v35.27,30.12 | v28.39,33.25 29.14,32.5 40.27,32.5 40.52,32.25 40.52,24.37 v40.14,24.37
DN  (via drill 0.3)
  Top 0.15: 22.39,28.25 22.52,28.25 22.64,28.37 22.64,29 J4.B7 | 22.39,28.25 22.02,28.25 21.77,28.5 21.77,29 J4.A7 | v22.77,26.37 22.77,24.62 23.64,23.75 23.89,23.75 D3.1 | 22.39,28.25 v22.77,27.87
  Bottom 0.15: v22.77,27.87 v22.77,26.37
DP
  Top 0.15: D3.3 23.89,25.62 23.89,25.87 21.27,28.5 21.27,29 J4.B6 21.27,29.12 21.27,29.62 21.52,29.87 22.02,29.87 22.14,29.75 22.14,29.12 J4.A6
EPD_3V3
  Top 0.3: 22.27,14.37 22.27,13.87 L5.1 | 22.27,14.37 22.27,14.5 C1-EP-DR.1 | 22.27,14.37 18.77,14.37 DMG2305UX-7.3 18.64,14.5 17.39,15.75 17.27,15.75 14.89,18.12 14.89,18.5 14.77,18.62 13.77,18.62 13.02,17.87 EPD_C5.2 12.89,17.87 11.27,16.25 10.77,16.25 J1.15 10.64,16.25 10.64,15.87 J1.16
GDR  (via drill 0.3)
  Top 0.15: 24.64,9.25 24.64,8.62 R2_EP_DR.2 | 24.64,9.25 25.14,9.75 Q3.1 | v9.89,22.75 10.52,22.75 J1.2 | 24.64,9.25 v21.64,12.25
  Bottom 0.15: v9.89,22.75 9.89,12.25 v21.64,12.25
GND  (via drill 0.3, 0.35)
  Top 0.15: 26.27,19.25 26.02,19.25 IC9.C1 25.89,19.25 25.89,18.87 IC9.C2 25.89,18.75 25.89,18.5 IC9.C3 25.89,18.37 27.02,17.25 27.02,15.5 27.64,14.87 C24.1 27.77,14.87 28.64,14.87 | 29.02,21.5 29.14,21.5 29.27,21.62 C6.2 | 29.02,21.5 26.77,21.5 | 29.02,21.5 29.02,22.62 C18.2 | 26.27,19.25 26.27,21.12 26.64,21.5 26.77,21.5 | 26.27,19.25 IC9.B1 | 26.77,21.5 C23.2 | 35.02,22.12 36.52,22.12 C8.2 | 35.02,22.12 34.14,22.12 C7.2 34.02,22 34.02,21.62 v33.89,21.5 | J2.3 37.02,11.25 35.89,11.25 J2.5 35.77,11.25 35.77,11.5 34.39,12.87 34.39,14.87 | C20.2 34.27,19.12 32.89,19.12 C21.2 | 34.39,14.87 34.39,19 C20.2 | 35.02,22.12 35.02,19.75 34.39,19.12 C20.2 | 34.39,14.87 28.64,14.87 | 19.27,3.5 18.39,2.62 15.89,2.62 C31.1 15.77,2.62 15.64,2.62 14.02,4.25 13.77,4.25 | 13.77,4.25 13.39,4.25 SW_ENT.1 | 13.77,4.25 12.77,5.25 10.27,5.25 7.77,2.75 5.39,2.75 SJ1.1 | 28.89,3.12 27.77,4.25 C34.2 27.64,4.37 24.52,4.37 | 28.89,3.12 29.39,2.62 30.27,2.62 C29.1 | 28.64,6.62 28.89,6.37 28.89,5.25 | 28.64,6.62 28.39,6.87 28.27,6.87 IC2.B3 | 28.89,3.12 28.89,5.25 | 28.89,5.25 34.89,5.25 35.39,4.75 35.39,4.37 SW_DN.1 | 14.27,15.37 14.27,16.37 EPD_C6.1 14.27,16.5 14.27,17.87 EPD_C5.1 | 14.27,13.25 14.27,14.25 EPD_C8.1 14.27,14.37 14.27,15.37 | EPD_C12.1 14.39,10 14.39,11 EPD_C11.1 14.27,11.12 14.27,12.12 EPD_C10.1 14.27,12.25 14.27,13.12 EPD_C9.1 14.27,13.25 | 14.27,15.37 EPD_C7.1 | 24.52,4.37 24.52,6.75 | 24.52,6.75 24.52,7.12 | 24.52,7.12 24.52,7.87 R2_EP_DR.1 | 24.52,7.12 21.77,7.12 D4.1 21.64,7 19.27,4.62 19.27,3.5 | 26.89,7.37 26.89,7.25 27.14,7 IC2.B1 | 26.89,7.37 26.89,8.87 27.52,9.5 27.77,9.5 C32.1 27.77,9.62 27.77,11.12 26.27,12.62 24.64,12.62 24.02,13.25
  Top 0.15: 26.89,7.37 26.39,6.87 25.64,6.87 R_TYPE_SEL.1 25.52,6.75 24.52,6.75 | 24.02,13.25 22.77,14.5 22.77,14.87 22.64,15 22.39,15 C1-EP-DR.2 | 24.02,13.25 14.27,13.25 | 24.52,4.37 SW_UP.1 | 19.27,3.5 C30.1 | 28.64,6.62 28.64,14.87 | C9.2 38.14,26.12 38.64,26.62 38.64,27.5 C3.2 38.52,27.62 38.52,27.87 38.27,28.12 38.27,28.37 C11.2 38.27,28.5 38.27,29.75 39.27,30.75 | 40.39,29 40.39,29.25 40.64,29.5 X1.2 40.64,29.62 39.64,30.62 39.39,30.62 X1.4 39.27,30.75 | 40.39,29 40.39,28.5 C1.2 | 40.39,29 41.39,28 | 41.39,28 41.52,27.87 41.52,27.62 C4.2 | 41.39,28 42.52,28 42.77,27.75 42.77,27.62 C22.2 | 32.64,32.5 32.27,32.5 C15.2 | 32.64,32.5 33.14,32.5 C16.2 33.27,32.5 35.39,32.5 35.89,33 C13.2 36.02,32.87 36.27,32.87 37.14,32 | 37.14,32 37.64,32.5 37.89,32.5 C10.2 38.02,32.5 38.77,32.5 | 37.14,32 36.14,31 C12.2 | 38.77,32.5 39.89,32.5 40.27,32.12 40.27,31.87 C2.2 | 39.27,30.75 39.27,31 38.77,31.5 38.77,32.5 | 26.39,33.75 28.52,33.75 29.39,32.87 30.14,32.87 C14.2 | 28.27,27.87 28.27,27.62 C17.1 | 28.27,27.87 29.02,28.62 29.27,28.62 C5.2 | J4.A1_B12 25.27,29.12 25.77,29.12 26.27,29.62 J4.SH3 26.39,29.75 26.39,33.75 | v27.77,28.37 28.27,27.87 | 26.39,33.75 J4.SH1 | 35.64,28.25 35.89,28 36.52,28 U1.P$F23 | U1.P$76 32.52,28.87 | 32.52,28.87 32.27,29.12 U1.P$B7 | U1.P$80 33.14,27.12 33.39,27.37 U1.P$74 | U1.P$76 | U1.P$76 U1.P$74 | U1.P$81 34.39,27.12 U1.P$74 | 35.02,27.62 34.39,28.25 U1.P$77 | 35.02,27.62 35.52,27.12 U1.P$82 | 35.02,27.62 U1.P$74 | 35.64,28.25 U1.P$78 | 35.64,28.25 U1.P$74 | 32.52,28.87 32.14,28.5 | 32.14,28.5 32.02,28.37 U1.P$75 32.14,28.5 | 32.52,28.87 U1.P$74 | U1.P$85 34.27,25.87 33.77,26.37 U1.P$74
  Top 0.15: U1.P$84 33.14,25.87 33.64,26.37 U1.P$74 | 32.64,32.5 32.64,30.37 32.14,29.87 32.14,28.5 | 10.27,19.75 10.02,19.5 10.02,15.5 10.14,15.37 10.52,15.37 J1.17 | 10.27,19.75 10.52,19.75 J1.8 10.27,19.75 | 10.27,19.75 8.02,22 8.02,24 J1.MP1 7.89,24.12 7.14,24.87 | 7.14,24.87 4.64,24.87 3.39,26.12 1.52,26.12 TP_GND.TP | 12.39,24.87 12.39,20.37 13.02,19.75 16.27,19.75 16.89,19.12 C33.2 17.02,19 18.14,19 C25.2 | 12.39,24.87 12.39,25.5 C19.2 | 12.27,29.87 13.14,29.87 13.64,30.37 C43.2 13.77,30.37 14.52,30.37 15.27,29.62 | IC1.D2 9.02,29.87 8.89,29.87 8.64,30.12 8.64,32 9.02,32.37 R9.1 9.14,32.37 11.52,32.37 12.02,32.87 U3.4 | 12.27,33 12.52,33 13.02,33.5 | 12.27,33 12.14,33 U3.4 | 13.02,33.5 13.14,33.62 U3.9 | U3.1 12.14,34.37 12.39,34.37 13.02,33.75 U3.9 | 13.02,33.5 14.02,33.5 U3.6 | 13.02,33.5 U3.9 | 12.27,33 12.27,29.87 | 12.27,29.87 C38.1 | 12.27,33 U3.4 | TP_BAT_GND.TP 6.39,29.75 8.39,27.75 9.02,27.75 C37.1 9.14,27.75 10.02,27.75 C39.2 10.14,27.62 12.77,27.62 v14.27,26.12 | R2_USB.2 23.27,22 23.52,22 24.02,22.5 R1_USB.1 24.14,22.5 24.27,22.62 | 24.27,22.62 24.89,23.25 24.89,24 24.27,24.62 24.02,24.62 D3.2 | 14.64,24.87 14.64,24.5 IC3.9 | 15.27,29.62 17.64,29.62 J4.SH4 | v17.77,24.87 18.52,24.12 18.52,23.87 R3.1 | v15.52,24.87 14.64,24.87 | 14.64,24.87 IC3.8 | J4.A12_B1 18.77,29.12 18.27,29.12 17.77,29.62 J4.SH4 | v23.89,23 24.27,22.62 | J4.SH2 17.77,33.75 17.77,29.75 J4.SH4 | 15.27,29.62 C42.2 | v12.64,24.87 12.39,24.87 | v7.27,25 7.14,24.87
  Bottom 0.15: J4.SH3 26.39,29.62 26.52,29.62 v27.77,28.37 31.89,28.37 U1.P$75 32.02,28.25 32.02,27.12 U1.P$79 | 32.02,24.75 32.02,25.75 U1.P$83 | U1.P$84 33.14,24.75 | 33.14,24.75 32.02,24.75 | 32.02,24.75 U1.P$87 | 33.14,24.75 U1.P$88 | 35.52,24.75 35.52,25.75 U1.P$86 | 34.39,24.75 34.39,25.75 U1.P$85 | 34.39,24.75 35.52,24.75 | 35.52,24.75 U1.P$90 | 34.39,24.75 U1.P$89 34.27,24.62 33.89,24.62 v33.89,21.5 | v17.77,24.87 17.77,29.62 J4.SH4 | v17.77,24.87 v15.52,24.87 v14.27,26.12 13.89,26.12 v12.64,24.87 | v23.89,23 22.02,24.87 v17.77,24.87 | v7.27,25 7.27,32.75 16.64,32.75 17.64,33.75 J4.SH2 17.77,33.75 26.27,33.75 J4.SH1
  other vias: 42.64,29.12 43.64,30.12 42.64,26.12 42.64,25.12
  pour Route2: 19.32,-50.34 19.3,-50.36 19.28,-50.38 19.24,-50.38 19.24,-61.22 65.18,-61.22 65.18,-32.6 65.14,-31.8 64.99,-31.01 64.75,-30.25 64.42,-29.52 64.01,-28.84 63.52,-28.21 62.95,-27.64 62.32,-27.15 61.64,-26.74 60.91,-26.41 60.15,-26.17 59.36,-26.02 58.56,-25.98 26.16,-25.98 25.34,-26.03 24.53,-26.17 23.74,-26.42 22.99,-26.76 22.28,-27.18 21.64,-27.69 21.05,-28.28 20.54,-28.92 20.12,-29.63 19.78,-30.38 19.53,-31.17 19.39,-31.98 19.34,-32.8 19.34,-50.32
  pour Route2: 0.06,10.56 0.04,10.54 0.02,10.52 -0.02,10.52 -0.02,-0.32 45.92,-0.32 45.92,28.3 45.88,29.1 45.73,29.89 45.49,30.65 45.16,31.38 44.75,32.06 44.26,32.69 43.69,33.26 43.06,33.75 42.38,34.16 41.65,34.49 40.89,34.73 40.1,34.88 39.3,34.92 6.9,34.92 6.08,34.87 5.27,34.73 4.48,34.48 3.73,34.14 3.02,33.72 2.38,33.21 1.79,32.62 1.28,31.98 0.86,31.27 0.52,30.52 0.27,29.73 0.13,28.92 0.08,28.1 0.08,10.58
  pour Top: -3.28,-0.8 46.56,-0.8 46.56,35.04 -3.28,35.04
  pour Bottom: -3.28,-0.8 46.56,-0.8 46.56,35.04 -3.28,35.04
JJ  (via drill 0.3)
  Top 0.15: U1.P$E24 37.02,28.25 37.02,28.75 v37.52,29.25 37.89,29.62 37.89,32 C10.1 | 31.77,31.12 31.77,32.62 32.02,32.87 | 31.77,31.12 31.77,29.25 U1.P$B5 | 32.02,32.87 32.14,33 C15.1 32.27,33 33.14,33 C16.1 | 32.02,32.87 31.89,32.87 31.27,33.5 L3.2 | 31.77,31.12 v31.89,31.12
  Bottom 0.15: v37.52,29.25 35.64,31.12 v31.89,31.12
LX1  (2 unrouted)
LX2
  Top 0.3: L7.2 24.02,15.87 24.02,17.37 24.14,17.5 24.77,17.5 25.52,18.25 25.52,18.37 IC9.D3 25.52,18.5 25.52,18.75 IC9.D2
N$1
  Top 0.15: IC1.D1 9.02,30.37 9.02,31.75 R9.2
N$2
  Top 0.15: IC9.D1 25.52,20.5 25.27,20.75 R4.2
N$3
  Top 0.15: IC9.E1 25.02,19.25 23.64,19.25 23.39,19.5 R2.2
N$4
  Top 0.15: R3.2 16.14,23.87 IC3.1
N$5  (via drill 0.3)
  Top 0.15: v32.27,23.62 31.77,23.62 U1.P$AC5 | v32.89,21.87 34.27,20.5 C20.1
  Bottom 0.15: v32.27,23.62 32.27,21.87 v32.89,21.87
N$6  (via drill 0.3)
  Top 0.15: v29.89,27.62 30.39,28.12 30.52,28.12 30.64,28 31.02,28 U1.P$F2 | v29.89,24.37 29.02,24.37 28.64,24 X2.1 28.52,23.87 28.52,22.75 C18.1
  Bottom 0.15: v29.89,24.37 v29.89,27.62
N$7  (1 unrouted)
  Top 0.15: C17.2 28.64,27.62 28.64,26.5 X2.2
N$8
  Top 0.15: U1.P$C1 30.52,28.75 29.89,28.75 C5.1
N$9
  Top 0.15: C9.1 37.02,26.12 U1.P$N24
N$10
  Top 0.15: U1.P$B3 31.27,29.25 31.27,30.5 L2.1
N$11
  Top 0.15: L2.2 31.27,31.62 31.27,32.5 L3.1
N$12  (via drill 0.3)
  Top 0.15: U1.P$H23 36.52,27.5 36.77,27.5 36.89,27.62 37.02,27.62 37.39,27.25 37.77,27.25 38.02,27.5 C3.1 38.14,27.5 v38.14,26.75 | v39.39,26.87 39.39,27.5 L1.1
  Bottom 0.15: v39.39,26.87 39.27,26.75 v38.14,26.75
N$13  (1 unrouted)
  Top 0.15: L1.2 40.39,27.62 41.02,27.62 C4.1 41.02,27.5 41.39,27.12 41.89,27.12 42.27,27.5 C22.1
N$14  (via drill 0.3)
  Top 0.15: v36.52,29.12 36.52,28.5 U1.P$D23 | v37.52,27.75 37.52,28.25 37.64,28.37 C11.1
  Bottom 0.15: v36.52,29.12 36.52,28.75 v37.52,27.75
N$15  (via drill 0.3)
  Top 0.15: v37.39,31.12 36.52,30.25 36.52,29.75 U1.P$A23 | v39.27,31.62 39.64,31.62 39.77,31.75 C2.1 39.89,31.75 39.89,31.5 40.64,30.75 X1.3
  Bottom 0.15: v37.39,31.12 37.89,31.62 v39.27,31.62
N$16  (via drill 0.3)
  Top 0.15: v37.39,30.37 37.02,30 37.02,29.25 U1.P$B24 | 39.39,28.75 39.52,28.75 39.77,28.5 C1.1 | 39.39,28.75 39.39,29.5 X1.1 | 39.39,28.75 v39.27,28.75
  Bottom 0.15: v37.39,30.37 39.02,28.75 v39.27,28.75
N$17  (via drill 0.3)
  Top 0.15: Q3.3 25.77,12 23.14,12 22.39,12.75 L5.2 22.27,12.75 19.77,12.75 C2-EP-DR.2 19.64,12.75 v18.52,11.62 | v11.64,8.87 D5.2
  Bottom 0.15: v11.64,8.87 14.39,11.62 v18.52,11.62
N$18
  Top 0.15: C2-EP-DR.1 19.64,12.12 18.14,10.62 D2.1 18.27,10.62 21.64,10.62 D4.2
N$20  (via drill 0.3)
  Top 0.15: R1_EP_DR.1 25.52,7.87 25.52,7.37 R_TYPE_SEL.2 25.52,7.25 v25.02,7.25 | v6.27,5.12 5.39,4.25 SJ1.2
  Bottom 0.15: v25.02,7.25 22.89,5.12 v6.27,5.12
N$22
  Top 0.15: U1.P$A18 35.02,29.75 34.52,30.25 34.52,31 35.89,32.37 C13.1
N$23
  Top 0.15: C32.2 27.77,9.12 27.77,7.5 IC2.A2
N$24  (via drill 0.3)
  Top 0.15: v11.39,22 11.27,21.87 10.64,21.87 J1.4 | v15.02,20.62 15.02,22.5 14.27,23.25 13.52,23.25 13.02,22.75 13.02,22.12 EPD_C2.2
  Bottom 0.15: v11.39,22 10.89,21.5 10.89,20.87 11.02,20.87 11.27,20.62 v15.02,20.62
N$25  (via drill 0.3)
  Top 0.15: v11.39,21.12 11.27,21.25 10.64,21.25 J1.5 | v13.64,22.75 13.64,21.5 13.02,20.87 EPD_C1.2
  Bottom 0.15: v11.39,21.12 12.77,22.5 13.39,22.5 v13.64,22.75
N$28
  Top 0.15: J1.18 10.64,14.87 11.27,14.87 12.89,16.5 EPD_C6.2
N$29
  Top 0.15: J1.19 10.64,14.37 11.89,14.37 12.89,15.37 EPD_C7.2
N$30
  Top 0.15: J1.20 10.64,13.87 12.39,13.87 12.89,14.37 EPD_C8.2
N$31
  Top 0.15: R1_USB.2 24.14,22 24.27,22 25.27,23 25.27,26.5 23.27,28.5 23.27,29 J4.A5
N$32
  Top 0.15: J1.22 10.64,12.75 12.27,12.75 12.89,12.12 EPD_C10.2
N$33  (via drill 0.3)
  Top 0.15: v16.39,3.12 15.89,3.12 C31.2 | v16.39,1.75 16.02,1.37 R8.1
  Bottom 0.15: v16.39,1.75 v16.39,3.12
N$34
  Top 0.15: J1.24 10.64,11.75 11.14,11.75 13.02,9.87 EPD_C12.2
N$35
  Top 0.15: R2_USB.1 23.14,22.5 23.14,23.75 22.39,24.5 22.39,26.12 20.27,28.25 20.27,29 J4.B5
N$36
  Top 0.15: C29.2 30.77,2.62 30.77,2.87 30.52,3.12 30.52,3.5 30.89,3.87 R7.1
OUT+
  Top 0.3: IC2.A3 28.27,7.5 28.27,11.12 25.02,14.37 23.39,14.37 23.14,14.62 23.14,15 19.89,18.25 15.77,18.25 14.64,19.37 12.89,19.37 12.02,20.25 12.02,22.87 9.27,25.62 4.39,25.62 3.39,26.62 3.39,30.12 5.64,32.37 5.64,33.37 TP_OP.TP
P0.13/1.5D
  Top 0.15: 20.39,4.25 20.39,4.5 20.02,4.87 R5.1 | 20.39,4.25 20.39,2.12 18.64,0.37 15.77,0.37 15.52,0.62 15.52,1.62 16.14,2.25 18.64,2.25 19.64,3.25 19.64,3.5 C30.2 | 20.39,4.25 21.64,4.25 SW_UP.2
P1.01/1.6C
  Top 0.15: R_PWR_EPD.1 19.02,17.37 19.02,17.12 19.52,16.62 DMG2305UX-7.1
PMIC_INT  (1 unrouted)
PREVGH
  Top 0.3: EPD_C9.2 12.89,13.25 10.64,13.25 J1.21 10.52,13.25 10.14,13.25 9.39,12.5 9.39,11.37 7.27,9.25 7.27,8 D5.1
PREVGL
  Top 0.3: EPD_C11.2 12.89,11 11.64,12.25 10.64,12.25 J1.23 10.52,12.25 10.14,12.25 9.89,12 9.89,11.5 14.27,7.12 18.14,7.12 D2.2
RESE  (via drill 0.3)
  Top 0.15: R1_EP_DR.2 25.52,8.62 v25.89,9 26.64,9.75 Q3.2 | v8.77,22.25 10.52,22.25 J1.3
  Bottom 0.15: v8.77,22.25 8.77,7.5 24.39,7.5 v25.89,9
RESET  (1 unrouted)
  Top 0.15: J2.6 35.77,9.87 35.77,9.5 34.89,8.62 34.89,6.37 39.14,2.12 42.89,2.12 44.02,3.25 44.02,6.37 TP_RESET.TP
SCL/1.4C  (via drill 0.3)
  Top 0.15: v26.64,6.5 27.14,6.5 IC2.C1 | v12.77,30.62 14.64,32.5 14.64,33.62 14.39,33.87 14.14,33.87 U3.7
  Bottom 0.15: v26.64,6.5 26.64,13 18.27,13 10.52,20.75 10.52,30.62 v12.77,30.62
SCL/2.4C  (via drill 0.3)  (1 unrouted)
  Top 0.15: v11.77,31.25 10.64,31.25 9.77,30.37 IC1.B1 | v28.39,31.37 28.77,31.75 28.77,32.12 R17.2 | v26.89,23 25.27,21.37 R4.1 | v17.39,21.62 15.64,23.37 15.64,23.87 IC3.12 | v44.39,14.12 44.39,15.25 44.14,15.5 TP_SCL.TP | v39.64,26.12 v44.39,21.37
  Bottom 0.15: v11.77,31.25 11.89,31.37 22.77,31.37 | 22.77,31.37 v28.39,31.37 30.89,28.87 35.89,28.87 37.02,27.75 37.02,26.12 v39.64,26.12 | v26.89,23 26.89,28.25 25.89,28.25 22.77,31.37 | v17.39,21.62 17.39,17.25 30.02,17.25 35.77,11.5 42.39,11.5 44.39,13.5 v44.39,14.12 v44.39,21.37
SDA/1.4C  (1 unrouted)
SDA/2.4C  (via drill 0.3)
  Top 0.15: v10.77,31.87 9.39,30.5 9.39,30.37 IC1.C1 | R18.2 28.14,32.12 28.02,32 v27.64,32 27.27,31.62 27.27,25.87 27.52,25.62 29.52,25.62 29.64,25.75 29.64,25.87 30.39,26.62 30.52,26.62 U1.P$L1 | v24.02,20.75 23.39,20.12 R2.1 | v14.77,26.62 16.27,26.62 17.02,25.87 17.02,25.12 16.39,24.5 16.14,24.5 IC3.2 | v43.02,13.12 44.14,12 TP_SDA.TP
  Bottom 0.15: v10.77,31.87 10.89,32 v27.64,32 27.77,32.12 40.14,32.12 40.14,26 39.77,25.62 37.64,25.62 37.02,25 | 37.02,25 36.14,24.12 35.89,24.12 35.89,22.87 33.77,20.75 v24.02,20.75 21.27,20.75 18.77,23.25 12.14,23.25 12.14,25 13.77,26.62 v14.77,26.62 | v43.02,13.12 43.02,21.12 40.89,21.12 37.02,25
SWDCLK  (via drill 0.3)
  Top 0.15: 44.52,9.62 44.27,9.37 TP_SWDCLK.TP 44.52,9.62 | 44.52,9.62 45.39,10.5 45.39,19.75 40.27,24.87 40.02,24.87 39.39,24.25 37.02,24.25 U1.P$AA24 | v36.52,10.5 37.02,10 J2.4 | 44.52,9.62 v42.77,9.62
  Bottom 0.15: v36.52,10.5 37.39,9.62 v42.77,9.62
SWDIO  (via drill 0.3)
  Top 0.15: v37.39,23.25 37.02,23.62 U1.P$AC24 | v37.39,21.12 37.39,14.25 38.02,13.62 38.02,11.75 37.64,11.37 37.64,10.62 38.02,10.25 | 38.02,10.25 38.27,10 J2.2 | 38.02,10.25 38.02,7.37 39.52,5.87 39.52,3.5 TP_SWDIO.TP
  Bottom 0.15: v37.39,21.12 v37.39,23.25
SWO  (via drill 0.3)
  Top 0.15: v36.39,23.75 36.14,23.5 36.14,23.37 36.02,23.25 U1.P$AD22 | v41.89,12 41.89,3.87 42.27,3.5 42.52,3.5 TP_SWO.TP
  Bottom 0.15: v36.39,23.75 36.39,20.5 42.02,20.5 42.39,20.12 42.39,12 v41.89,12
VBAT/1.2A  (via drill 0.3)
  Top 0.15: U3.2 12.14,33.87 12.14,33.5 U3.3 12.02,33.37 11.02,33.37 C27.2 11.02,33.5 v11.02,33.87 | v4.14,32.75 3.27,31.87 TP_VBAT.TP
  Bottom 0.15: v11.02,33.87 10.27,33.12 4.52,33.12 v4.14,32.75
VBAT/2.5C  (1 unrouted)
VBUS/1.5D
  Top 0.15: C42.1 15.27,29.25 15.27,29.12 | J4.A9_B4 19.64,29.12 19.64,29.5 20.39,30.25 23.64,30.25 24.39,29.5 24.39,29.12 J4.A4_B9
  Top 0.3: C43.1 13.77,29.12 15.27,29.12 15.64,29.12 20.12,24.64 D3.5 21.14,25.01 20.8,25.01 20.63,25.17 20.63,26.56 19.61,27.58 J4.A9_B4
VBUS/2.6D  (via drill 0.3)
  Top 0.3: 11.39,29.87 11.77,29.87 C38.2 | 11.39,29.87 10.27,29.87 IC1.A2 | v30.52,23.12 31.02,23.12 U1.P$AD2 | v31.39,21.87 32.77,20.5 C21.1 | v11.39,30 11.39,29.87
  Bottom 0.3: 30.52,22.37 30.52,21.87 v31.39,21.87 | 30.52,22.37 v30.52,23.12 | v11.39,30 16.27,30 17.27,31 20.39,31 26.27,25.12 26.27,22.37 30.52,22.37
VREG  (via drill 0.3)  (1 unrouted)
  Top 0.3: 26.77,19.25 26.77,18.87 IC9.A2 26.77,18.75 26.77,18.5 IC9.A3 26.77,18.37 27.64,17.5 27.64,16.12 C24.2 | 26.77,19.25 IC9.A1 | 26.77,19.25 v26.77,20.12 26.77,21 C23.1 | TP_VREG.TP 8.27,33.5 8.27,30 10.02,28.25 C39.1 10.14,28.12 15.27,28.12 19.02,24.37 v19.02,22.12
  Bottom 0.3: v26.77,20.12 21.02,20.12 v19.02,22.12